# EAGLE board Enclosure.Front (EAGLE 7.6.0)
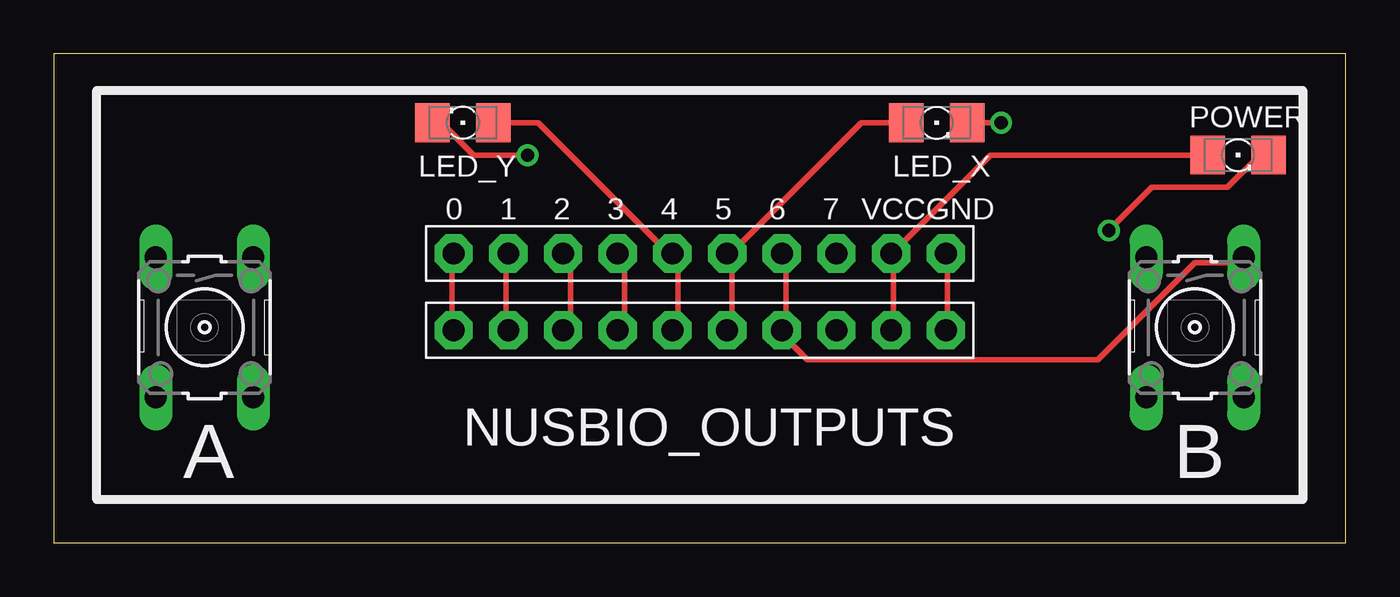
[diagram p0: board, top side]
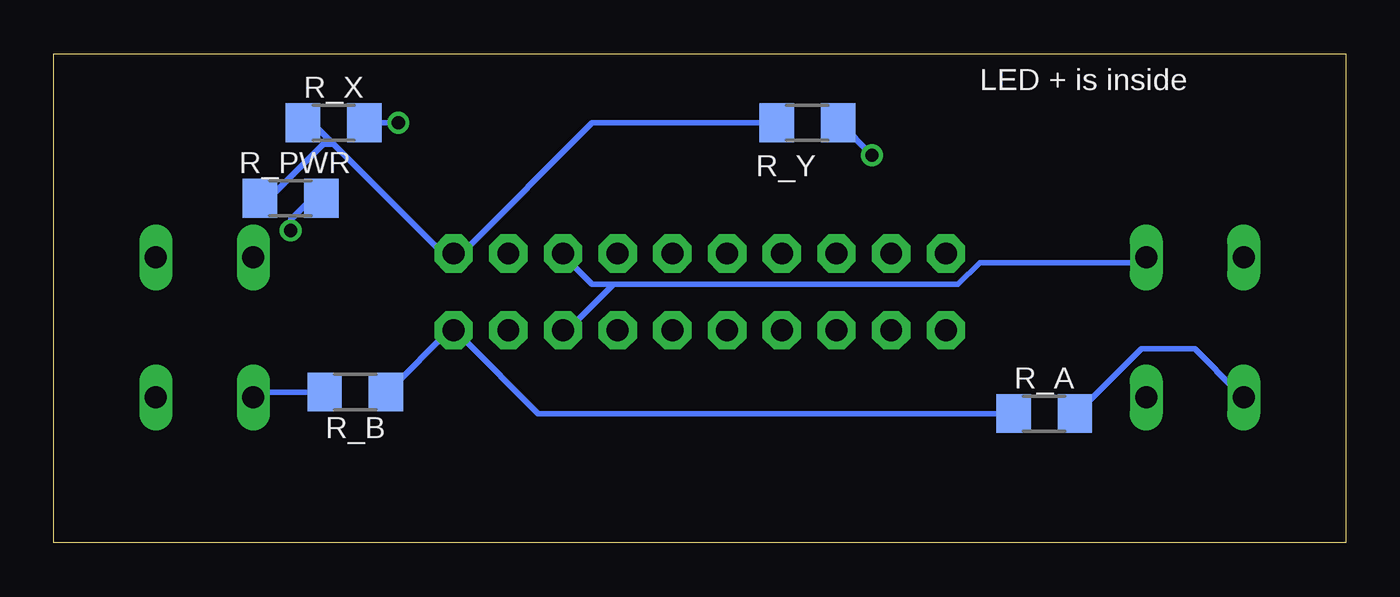
[diagram p1: board, bottom side, seen from below]

Size 60 x 22.7 mm. Coordinates in mm from the lower left corner, seen from the top.
Outline: 0,0 60,0 60,22.7 0,22.7 0,0
Copper layers (1*16): Top 0.035mm / dielectric 1.5mm / Bottom 0.035mm
Design rules "default": minimum track width 10mil, minimum drill 24mil, track to track 8mil, track to pad 8mil, pad to pad 8mil, via to via 8mil, smd to smd 8mil, copper to edge 40mil, drill to drill 8mil, minimum pad ring 10mil, minimum via ring 8mil, stop-mask expansion 4mil, vias tented up to drill 0mil, thermal gap 10mil

## Footprints (pad centres in the part's own frame; a part is rotated, then mirrored left to right if it is on the bottom)
B3F-10XX = drill 1.016 long: 1 -3.251,2.261; 2 3.251,2.261; 3 -3.251,-2.261; 4 3.251,-2.261
1206 = smd 1.6 x 1.803: A -1.422,0; C 1.422,0
1X10-BIG = drill 1.016 pad 1.778 octagon: 1 -11.43,0; 2 -8.89,0; 3 -6.35,0; 4 -3.81,0; 5 -1.27,0; 6 1.27,0; 7 3.81,0; 8 6.35,0; 9 8.89,0; 10 11.43,0
R1206 = smd 1.6 x 1.803: 1 -1.422,0; 2 1.422,0

## Placement (x,y rotation side)
A  [B3F-10XX]  7,10 270 top
B  [B3F-10XX]  53,10 270 top
LED_X  [1206]  41,19.5 0 top
LED_Y  [1206]  19,19.5 180 top
NUSBIO_IN  PINHD-1X10  [1X10-BIG]  30,9.87 0 top
NUSBIO_OUTPUTS  PINHD-1X10  [1X10-BIG]  30,13.43 0 top
POWER  [1206]  55,18 0 top
R_A  [R1206]  14,6 0 bottom
R_B  [R1206]  46,7 180 bottom
R_PWR  [R1206]  49,16 0 bottom
R_X  [R1206]  47,19.5 0 bottom
R_Y  [R1206]  25,19.5 0 bottom

## Library data of the parts
A B = switch-omron; MPN: B3F-1000; OC_FARNELL: 176432; OC_NEWARK: 36M3542
LED_X LED_Y NUSBIO_IN NUSBIO_OUTPUTS POWER R_A R_B R_PWR R_X R_Y = adafruit

## Nets
GND: NUSBIO_IN.10 NUSBIO_OUTPUTS.10 R_A.1 R_B.1 R_PWR.1 R_X.1 R_Y.1
GPIO_0: NUSBIO_IN.1 NUSBIO_OUTPUTS.1
GPIO_1: NUSBIO_IN.2 NUSBIO_OUTPUTS.2
GPIO_2: NUSBIO_IN.3 NUSBIO_OUTPUTS.3
GPIO_3: NUSBIO_IN.4 NUSBIO_OUTPUTS.4
GPIO_4: LED_Y.A NUSBIO_IN.5 NUSBIO_OUTPUTS.5
GPIO_5: LED_X.A NUSBIO_IN.6 NUSBIO_OUTPUTS.6
GPIO_6: B.1 NUSBIO_IN.7 NUSBIO_OUTPUTS.7
GPIO_7: A.1 NUSBIO_IN.8 NUSBIO_OUTPUTS.8
N$1: POWER.C R_PWR.2
N$2: A.4 R_A.2
N$3: B.4 R_B.2
N$4: LED_X.C R_X.2
N$5: LED_Y.C R_Y.2
VCC: NUSBIO_IN.9 NUSBIO_OUTPUTS.9 POWER.A

## Tracks (layer width: path | path; a pad name or v marks a point on that pad's centre or on a via)
GND
  Top 0.254: NUSBIO_OUTPUTS.10 41.5,13 41.5,10 NUSBIO_IN.10
  Bottom 0.254: R_Y.1 35,19.5 41,13.5 NUSBIO_OUTPUTS.10 41.5,13 47,18.5 | 47,18.5 48,19.5 R_X.1 | 47,18.5 47.5,18.5 50,16 R_PWR.1 | R_A.1 37.5,6 41,9.5 NUSBIO_IN.10 41.5,10 44.5,7 R_B.1
GPIO_0
  Top 0.254: NUSBIO_IN.1 18.5,10 18.5,13 NUSBIO_OUTPUTS.1
GPIO_1
  Top 0.254: NUSBIO_IN.2 21,10 21,13 NUSBIO_OUTPUTS.2
GPIO_2
  Top 0.254: NUSBIO_IN.3 24,10 24,13 NUSBIO_OUTPUTS.3
GPIO_3
  Top 0.254: NUSBIO_IN.4 26.5,10 26.5,13 NUSBIO_OUTPUTS.4
GPIO_4
  Top 0.254: LED_Y.A 22.5,19.5 28.5,13.5 NUSBIO_OUTPUTS.5 29,13 29,10 NUSBIO_IN.5
GPIO_5
  Top 0.254: LED_X.A 37.5,19.5 31.5,13.5 NUSBIO_OUTPUTS.6 31.5,13 31.5,10 NUSBIO_IN.6
GPIO_6
  Top 0.254: B.1 55,13 53,13 48.5,8.5 35,8.5 34,9.5 NUSBIO_IN.7 34,10 34,13 NUSBIO_OUTPUTS.7
GPIO_7
  Bottom 0.254: 34,12 35,12 36,13 NUSBIO_OUTPUTS.8 | 34,12 18,12 17,13 9.5,13 A.1 | 34,12 36,10 NUSBIO_IN.8
N$1  (via drill 0.61)
  Top 0.254: v49,14.5 51,16.5 54.5,16.5 56,18 POWER.C
  Bottom 0.254: v49,14.5 49,15 48,16 R_PWR.2
N$2
  Bottom 0.254: R_A.2 12.5,6 9.5,9 7,9 5,7 A.4
N$3
  Bottom 0.254: R_B.2 50.5,7 B.4
N$4  (via drill 0.61)
  Top 0.254: v44,19.5 LED_X.C
  Bottom 0.254: R_X.2 v44,19.5
N$5  (via drill 0.61)
  Top 0.254: v22,18 19.5,18 18,19.5 LED_Y.C
  Bottom 0.254: v22,18 23.5,19.5 R_Y.2
VCC
  Top 0.254: POWER.A 43.5,18 39,13.5 NUSBIO_OUTPUTS.9 39,13 39,10 NUSBIO_IN.9

## Text on the board
tNames: 0 | 1 | 2 | 3 | 4 | 5 | 6 | 7 | VCC | GND
bNames: LED + is inside